# EAGLE board ADXL377 Breakout-Panel-v10 (EAGLE 6.5.0), part 1 of 2
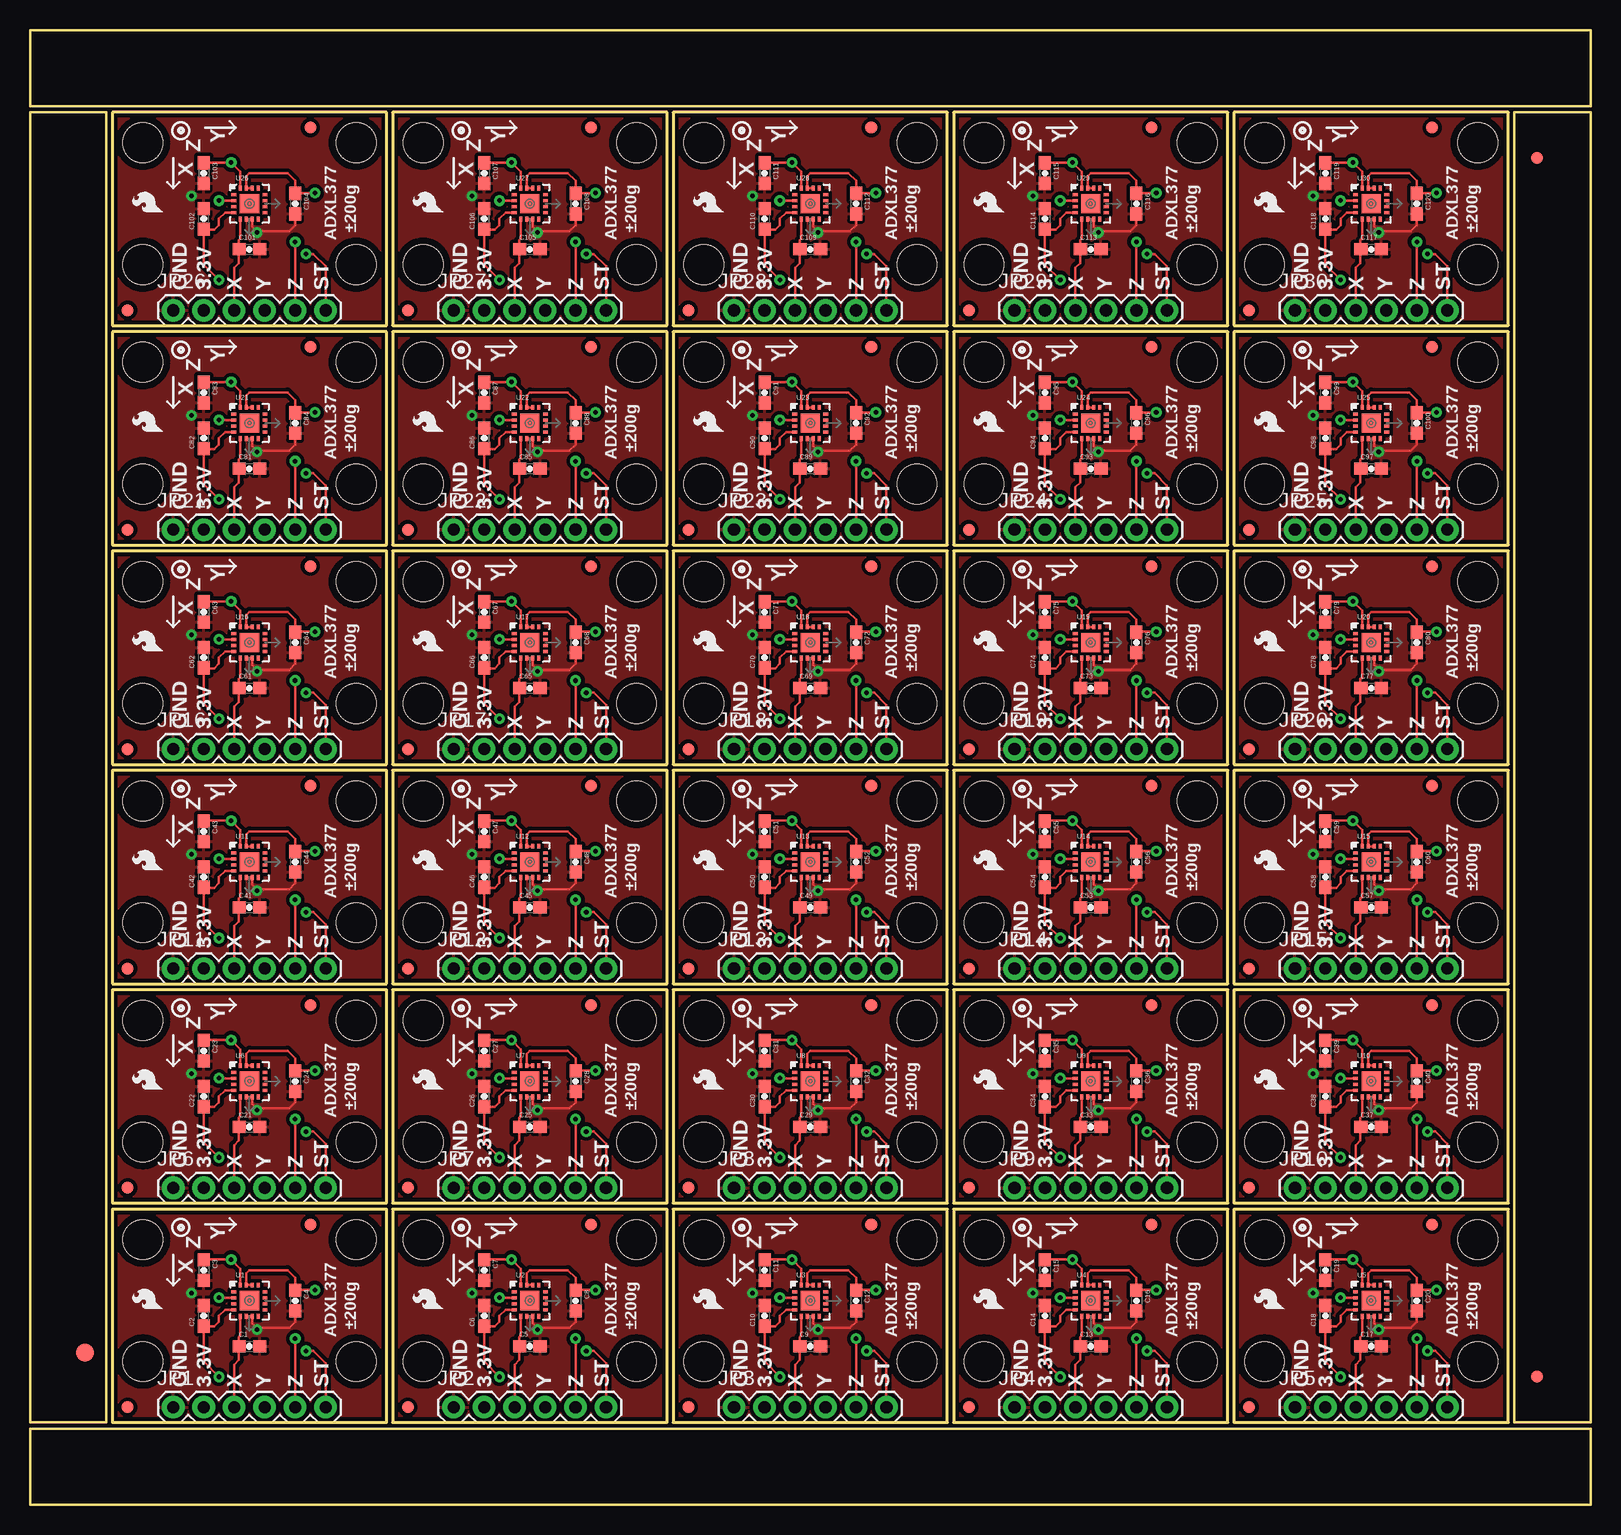
[diagram p0: board, top side]
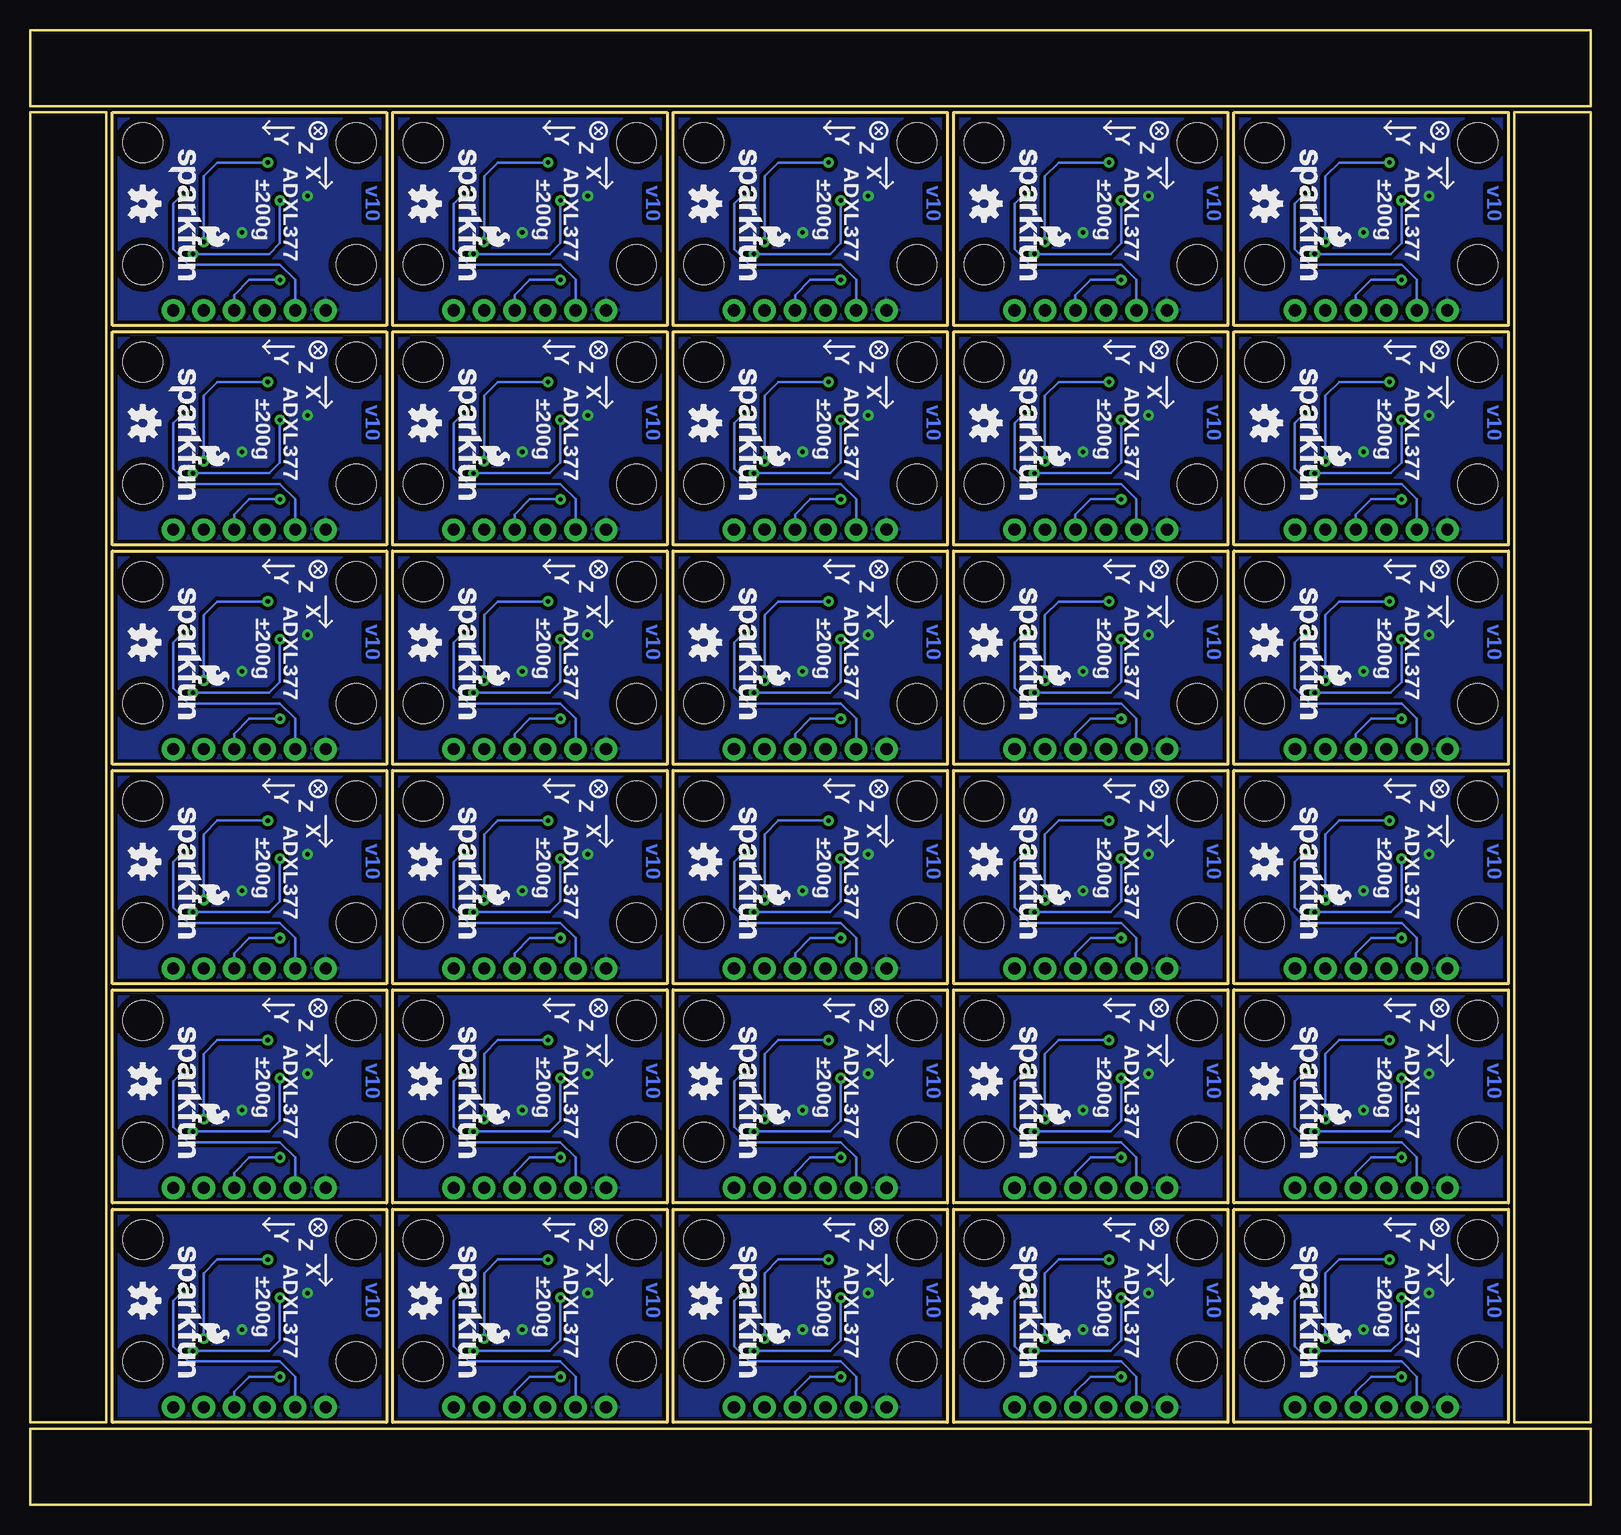
[diagram p1: board, bottom side, seen from below]

Size 130.05 x 122.94 mm. Coordinates in mm from the lower left corner, seen from the top.
Outline: 6.86,6.86 29.72,6.86 29.72,24.64 6.86,24.64 6.86,6.86
Outline: 30.23,6.86 53.09,6.86 53.09,24.64 30.23,24.64 30.23,6.86
Outline: 53.59,6.86 76.45,6.86 76.45,24.64 53.59,24.64 53.59,6.86
Outline: 76.96,6.86 99.82,6.86 99.82,24.64 76.96,24.64 76.96,6.86
Outline: 100.33,6.86 123.19,6.86 123.19,24.64 100.33,24.64 100.33,6.86
Outline: 6.86,25.15 29.72,25.15 29.72,42.93 6.86,42.93 6.86,25.15
Outline: 30.23,25.15 53.09,25.15 53.09,42.93 30.23,42.93 30.23,25.15
Outline: 53.59,25.15 76.45,25.15 76.45,42.93 53.59,42.93 53.59,25.15
Outline: 76.96,25.15 99.82,25.15 99.82,42.93 76.96,42.93 76.96,25.15
Outline: 100.33,25.15 123.19,25.15 123.19,42.93 100.33,42.93 100.33,25.15
Outline: 6.86,43.43 29.72,43.43 29.72,61.21 6.86,61.21 6.86,43.43
Outline: 30.23,43.43 53.09,43.43 53.09,61.21 30.23,61.21 30.23,43.43
Outline: 53.59,43.43 76.45,43.43 76.45,61.21 53.59,61.21 53.59,43.43
Outline: 76.96,43.43 99.82,43.43 99.82,61.21 76.96,61.21 76.96,43.43
Outline: 100.33,43.43 123.19,43.43 123.19,61.21 100.33,61.21 100.33,43.43
Outline: 6.86,61.72 29.72,61.72 29.72,79.5 6.86,79.5 6.86,61.72
Outline: 30.23,61.72 53.09,61.72 53.09,79.5 30.23,79.5 30.23,61.72
Outline: 53.59,61.72 76.45,61.72 76.45,79.5 53.59,79.5 53.59,61.72
Outline: 76.96,61.72 99.82,61.72 99.82,79.5 76.96,79.5 76.96,61.72
Outline: 100.33,61.72 123.19,61.72 123.19,79.5 100.33,79.5 100.33,61.72
Outline: 6.86,80.01 29.72,80.01 29.72,97.79 6.86,97.79 6.86,80.01
Outline: 30.23,80.01 53.09,80.01 53.09,97.79 30.23,97.79 30.23,80.01
Outline: 53.59,80.01 76.45,80.01 76.45,97.79 53.59,97.79 53.59,80.01
Outline: 76.96,80.01 99.82,80.01 99.82,97.79 76.96,97.79 76.96,80.01
Outline: 100.33,80.01 123.19,80.01 123.19,97.79 100.33,97.79 100.33,80.01
Outline: 6.86,98.3 29.72,98.3 29.72,116.08 6.86,116.08 6.86,98.3
Outline: 30.23,98.3 53.09,98.3 53.09,116.08 30.23,116.08 30.23,98.3
Outline: 53.59,98.3 76.45,98.3 76.45,116.08 53.59,116.08 53.59,98.3
Outline: 76.96,98.3 99.82,98.3 99.82,116.08 76.96,116.08 76.96,98.3
Outline: 100.33,98.3 123.19,98.3 123.19,116.08 100.33,116.08 100.33,98.3
Outline: 6.35,6.86 6.35,116.08 0,116.08 0,6.86 6.35,6.86
Outline: 0,0 130.05,0 130.05,6.35 0,6.35 0,0
Outline: 130.05,6.86 130.05,116.08 123.7,116.08 123.7,6.86 130.05,6.86
Outline: 130.05,122.94 0,122.94 0,116.59 130.05,116.59 130.05,122.94
Copper layers (1*16): Top 0.035mm / dielectric 1.5mm / Bottom 0.035mm
Design rules "SparkFun": minimum track width 8mil, minimum drill 20mil, track to track 8mil, track to pad 8mil, pad to pad 8mil, via to via 8mil, smd to smd 8mil, copper to edge 8mil, drill to drill 8mil, minimum pad ring 12mil, minimum via ring 10mil, stop-mask expansion 4mil, vias tented up to drill 20mil, thermal gap 10mil

## Footprints (pad centres in the part's own frame; a part is rotated, then mirrored left to right if it is on the bottom)
0603-CAP = smd 1.1 x 1: 1 -0.85,0; 2 0.85,0
FIDUCIAL-1.5X3 = smd 1.5 x 1.5: 1 0,0
FIDUCIAL-1X2 = smd 1 x 1: 1 0,0
1X06 = drill 1.016 pad 1.88: 1 0,0; 2 2.54,0; 3 5.08,0; 4 7.62,0; 5 10.16,0; 6 12.7,0
STAND-OFF = hole 3.302: 0,0
LFCSP_LQ-16 = smd 0.4 x 0.25: 1 -1.3,0.75; 2 -1.3,0.25; 3 -1.3,-0.25; 4 -1.3,-0.75; 9 1.3,-0.75; 10 1.3,-0.25; 11 1.3,0.25; 12 1.3,0.75 | smd 0.25 x 0.4: 5 -0.75,-1.3; 6 -0.25,-1.3; 7 0.25,-1.3; 8 0.75,-1.3; 13 0.75,1.3; 14 0.25,1.3; 15 -0.25,1.3; 16 -0.75,1.3 | smd 1.6 x 1.6: EXP 0,0

## Placement (x,y rotation side)
C1  10nF  [0603-CAP]  18.29,13.21 0 top
C2  10nF  [0603-CAP]  14.48,15.75 90 top
C3  10nF  [0603-CAP]  14.48,19.56 270 top
C4  0.1uF  [0603-CAP]  22.1,17.02 270 top
C5  10nF  [0603-CAP]  41.66,13.21 0 top
C6  10nF  [0603-CAP]  37.85,15.75 90 top
C7  10nF  [0603-CAP]  37.85,19.56 270 top
C8  0.1uF  [0603-CAP]  45.47,17.02 270 top
C9  10nF  [0603-CAP]  65.02,13.21 0 top
C10  10nF  [0603-CAP]  61.21,15.75 90 top
C11  10nF  [0603-CAP]  61.21,19.56 270 top
C12  0.1uF  [0603-CAP]  68.83,17.02 270 top
C13  10nF  [0603-CAP]  88.39,13.21 0 top
C14  10nF  [0603-CAP]  84.58,15.75 90 top
C15  10nF  [0603-CAP]  84.58,19.56 270 top
C16  0.1uF  [0603-CAP]  92.2,17.02 270 top
C17  10nF  [0603-CAP]  111.76,13.21 0 top
C18  10nF  [0603-CAP]  107.95,15.75 90 top
C19  10nF  [0603-CAP]  107.95,19.56 270 top
C20  0.1uF  [0603-CAP]  115.57,17.02 270 top
C21  10nF  [0603-CAP]  18.29,31.5 0 top
C22  10nF  [0603-CAP]  14.48,34.04 90 top
C23  10nF  [0603-CAP]  14.48,37.85 270 top
C24  0.1uF  [0603-CAP]  22.1,35.31 270 top
C25  10nF  [0603-CAP]  41.66,31.5 0 top
C26  10nF  [0603-CAP]  37.85,34.04 90 top
C27  10nF  [0603-CAP]  37.85,37.85 270 top
C28  0.1uF  [0603-CAP]  45.47,35.31 270 top
C29  10nF  [0603-CAP]  65.02,31.5 0 top
C30  10nF  [0603-CAP]  61.21,34.04 90 top
C31  10nF  [0603-CAP]  61.21,37.85 270 top
C32  0.1uF  [0603-CAP]  68.83,35.31 270 top
C33  10nF  [0603-CAP]  88.39,31.5 0 top
C34  10nF  [0603-CAP]  84.58,34.04 90 top
C35  10nF  [0603-CAP]  84.58,37.85 270 top
C36  0.1uF  [0603-CAP]  92.2,35.31 270 top
C37  10nF  [0603-CAP]  111.76,31.5 0 top
C38  10nF  [0603-CAP]  107.95,34.04 90 top
C39  10nF  [0603-CAP]  107.95,37.85 270 top
C40  0.1uF  [0603-CAP]  115.57,35.31 270 top
C41  10nF  [0603-CAP]  18.29,49.78 0 top
C42  10nF  [0603-CAP]  14.48,52.32 90 top
C43  10nF  [0603-CAP]  14.48,56.13 270 top
C44  0.1uF  [0603-CAP]  22.1,53.59 270 top
C45  10nF  [0603-CAP]  41.66,49.78 0 top
C46  10nF  [0603-CAP]  37.85,52.32 90 top
C47  10nF  [0603-CAP]  37.85,56.13 270 top
C48  0.1uF  [0603-CAP]  45.47,53.59 270 top
C49  10nF  [0603-CAP]  65.02,49.78 0 top
C50  10nF  [0603-CAP]  61.21,52.32 90 top
C51  10nF  [0603-CAP]  61.21,56.13 270 top
C52  0.1uF  [0603-CAP]  68.83,53.59 270 top
C53  10nF  [0603-CAP]  88.39,49.78 0 top
C54  10nF  [0603-CAP]  84.58,52.32 90 top
C55  10nF  [0603-CAP]  84.58,56.13 270 top
C56  0.1uF  [0603-CAP]  92.2,53.59 270 top
C57  10nF  [0603-CAP]  111.76,49.78 0 top
C58  10nF  [0603-CAP]  107.95,52.32 90 top
C59  10nF  [0603-CAP]  107.95,56.13 270 top
C60  0.1uF  [0603-CAP]  115.57,53.59 270 top
C61  10nF  [0603-CAP]  18.29,68.07 0 top
C62  10nF  [0603-CAP]  14.48,70.61 90 top
C63  10nF  [0603-CAP]  14.48,74.42 270 top
C64  0.1uF  [0603-CAP]  22.1,71.88 270 top
C65  10nF  [0603-CAP]  41.66,68.07 0 top
C66  10nF  [0603-CAP]  37.85,70.61 90 top
C67  10nF  [0603-CAP]  37.85,74.42 270 top
C68  0.1uF  [0603-CAP]  45.47,71.88 270 top
C69  10nF  [0603-CAP]  65.02,68.07 0 top
C70  10nF  [0603-CAP]  61.21,70.61 90 top
C71  10nF  [0603-CAP]  61.21,74.42 270 top
C72  0.1uF  [0603-CAP]  68.83,71.88 270 top
C73  10nF  [0603-CAP]  88.39,68.07 0 top
C74  10nF  [0603-CAP]  84.58,70.61 90 top
C75  10nF  [0603-CAP]  84.58,74.42 270 top
C76  0.1uF  [0603-CAP]  92.2,71.88 270 top
C77  10nF  [0603-CAP]  111.76,68.07 0 top
C78  10nF  [0603-CAP]  107.95,70.61 90 top
C79  10nF  [0603-CAP]  107.95,74.42 270 top
C80  0.1uF  [0603-CAP]  115.57,71.88 270 top
C81  10nF  [0603-CAP]  18.29,86.36 0 top
C82  10nF  [0603-CAP]  14.48,88.9 90 top
C83  10nF  [0603-CAP]  14.48,92.71 270 top
C84  0.1uF  [0603-CAP]  22.1,90.17 270 top
C85  10nF  [0603-CAP]  41.66,86.36 0 top
C86  10nF  [0603-CAP]  37.85,88.9 90 top
C87  10nF  [0603-CAP]  37.85,92.71 270 top
C88  0.1uF  [0603-CAP]  45.47,90.17 270 top
C89  10nF  [0603-CAP]  65.02,86.36 0 top
C90  10nF  [0603-CAP]  61.21,88.9 90 top
C91  10nF  [0603-CAP]  61.21,92.71 270 top
C92  0.1uF  [0603-CAP]  68.83,90.17 270 top
C93  10nF  [0603-CAP]  88.39,86.36 0 top
C94  10nF  [0603-CAP]  84.58,88.9 90 top
C95  10nF  [0603-CAP]  84.58,92.71 270 top
C96  0.1uF  [0603-CAP]  92.2,90.17 270 top
C97  10nF  [0603-CAP]  111.76,86.36 0 top
C98  10nF  [0603-CAP]  107.95,88.9 90 top
C99  10nF  [0603-CAP]  107.95,92.71 270 top
C100  0.1uF  [0603-CAP]  115.57,90.17 270 top
C101  10nF  [0603-CAP]  18.29,104.65 0 top
C102  10nF  [0603-CAP]  14.48,107.19 90 top
C103  10nF  [0603-CAP]  14.48,111 270 top
C104  0.1uF  [0603-CAP]  22.1,108.46 270 top
C105  10nF  [0603-CAP]  41.66,104.65 0 top
C106  10nF  [0603-CAP]  37.85,107.19 90 top
C107  10nF  [0603-CAP]  37.85,111 270 top
C108  0.1uF  [0603-CAP]  45.47,108.46 270 top
C109  10nF  [0603-CAP]  65.02,104.65 0 top
C110  10nF  [0603-CAP]  61.21,107.19 90 top
C111  10nF  [0603-CAP]  61.21,111 270 top
C112  0.1uF  [0603-CAP]  68.83,108.46 270 top
C113  10nF  [0603-CAP]  88.39,104.65 0 top
C114  10nF  [0603-CAP]  84.58,107.19 90 top
C115  10nF  [0603-CAP]  84.58,111 270 top
C116  0.1uF  [0603-CAP]  92.2,108.46 270 top
C117  10nF  [0603-CAP]  111.76,104.65 0 top
C118  10nF  [0603-CAP]  107.95,107.19 90 top
C119  10nF  [0603-CAP]  107.95,111 270 top
C120  0.1uF  [0603-CAP]  115.57,108.46 270 top
E$1  [FIDUCIAL-1.5X3]  4.57,12.7 0 top
E$4  [FIDUCIAL-1X2]  125.6,10.67 0 top
E$6  [FIDUCIAL-1X2]  125.6,112.27 180 top
FID1  FIDUCIAL1X2  [FIDUCIAL-1X2]  23.37,23.37 0 top
FID2  FIDUCIAL1X2  [FIDUCIAL-1X2]  8.13,8.13 0 top
FID3  FIDUCIAL1X2  [FIDUCIAL-1X2]  46.74,23.37 0 top
FID4  FIDUCIAL1X2  [FIDUCIAL-1X2]  31.5,8.13 0 top
FID5  FIDUCIAL1X2  [FIDUCIAL-1X2]  70.1,23.37 0 top
FID6  FIDUCIAL1X2  [FIDUCIAL-1X2]  54.86,8.13 0 top
FID7  FIDUCIAL1X2  [FIDUCIAL-1X2]  93.47,23.37 0 top
FID8  FIDUCIAL1X2  [FIDUCIAL-1X2]  78.23,8.13 0 top
FID9  FIDUCIAL1X2  [FIDUCIAL-1X2]  116.84,23.37 0 top
FID10  FIDUCIAL1X2  [FIDUCIAL-1X2]  101.6,8.13 0 top
FID11  FIDUCIAL1X2  [FIDUCIAL-1X2]  23.37,41.66 0 top
FID12  FIDUCIAL1X2  [FIDUCIAL-1X2]  8.13,26.42 0 top
FID13  FIDUCIAL1X2  [FIDUCIAL-1X2]  46.74,41.66 0 top
FID14  FIDUCIAL1X2  [FIDUCIAL-1X2]  31.5,26.42 0 top
FID15  FIDUCIAL1X2  [FIDUCIAL-1X2]  70.1,41.66 0 top
FID16  FIDUCIAL1X2  [FIDUCIAL-1X2]  54.86,26.42 0 top
FID17  FIDUCIAL1X2  [FIDUCIAL-1X2]  93.47,41.66 0 top
FID18  FIDUCIAL1X2  [FIDUCIAL-1X2]  78.23,26.42 0 top
FID19  FIDUCIAL1X2  [FIDUCIAL-1X2]  116.84,41.66 0 top
FID20  FIDUCIAL1X2  [FIDUCIAL-1X2]  101.6,26.42 0 top
FID21  FIDUCIAL1X2  [FIDUCIAL-1X2]  23.37,59.94 0 top
FID22  FIDUCIAL1X2  [FIDUCIAL-1X2]  8.13,44.7 0 top
FID23  FIDUCIAL1X2  [FIDUCIAL-1X2]  46.74,59.94 0 top
FID24  FIDUCIAL1X2  [FIDUCIAL-1X2]  31.5,44.7 0 top
FID25  FIDUCIAL1X2  [FIDUCIAL-1X2]  70.1,59.94 0 top
FID26  FIDUCIAL1X2  [FIDUCIAL-1X2]  54.86,44.7 0 top
FID27  FIDUCIAL1X2  [FIDUCIAL-1X2]  93.47,59.94 0 top
FID28  FIDUCIAL1X2  [FIDUCIAL-1X2]  78.23,44.7 0 top
FID29  FIDUCIAL1X2  [FIDUCIAL-1X2]  116.84,59.94 0 top
FID30  FIDUCIAL1X2  [FIDUCIAL-1X2]  101.6,44.7 0 top
FID31  FIDUCIAL1X2  [FIDUCIAL-1X2]  23.37,78.23 0 top
FID32  FIDUCIAL1X2  [FIDUCIAL-1X2]  8.13,62.99 0 top
FID33  FIDUCIAL1X2  [FIDUCIAL-1X2]  46.74,78.23 0 top
FID34  FIDUCIAL1X2  [FIDUCIAL-1X2]  31.5,62.99 0 top
FID35  FIDUCIAL1X2  [FIDUCIAL-1X2]  70.1,78.23 0 top
FID36  FIDUCIAL1X2  [FIDUCIAL-1X2]  54.86,62.99 0 top
FID37  FIDUCIAL1X2  [FIDUCIAL-1X2]  93.47,78.23 0 top
FID38  FIDUCIAL1X2  [FIDUCIAL-1X2]  78.23,62.99 0 top
FID39  FIDUCIAL1X2  [FIDUCIAL-1X2]  116.84,78.23 0 top
FID40  FIDUCIAL1X2  [FIDUCIAL-1X2]  101.6,62.99 0 top
FID41  FIDUCIAL1X2  [FIDUCIAL-1X2]  23.37,96.52 0 top
FID42  FIDUCIAL1X2  [FIDUCIAL-1X2]  8.13,81.28 0 top
FID43  FIDUCIAL1X2  [FIDUCIAL-1X2]  46.74,96.52 0 top
FID44  FIDUCIAL1X2  [FIDUCIAL-1X2]  31.5,81.28 0 top
FID45  FIDUCIAL1X2  [FIDUCIAL-1X2]  70.1,96.52 0 top
FID46  FIDUCIAL1X2  [FIDUCIAL-1X2]  54.86,81.28 0 top
FID47  FIDUCIAL1X2  [FIDUCIAL-1X2]  93.47,96.52 0 top
FID48  FIDUCIAL1X2  [FIDUCIAL-1X2]  78.23,81.28 0 top
FID49  FIDUCIAL1X2  [FIDUCIAL-1X2]  116.84,96.52 0 top
FID50  FIDUCIAL1X2  [FIDUCIAL-1X2]  101.6,81.28 0 top
FID51  FIDUCIAL1X2  [FIDUCIAL-1X2]  23.37,114.81 0 top
FID52  FIDUCIAL1X2  [FIDUCIAL-1X2]  8.13,99.57 0 top
FID53  FIDUCIAL1X2  [FIDUCIAL-1X2]  46.74,114.81 0 top
FID54  FIDUCIAL1X2  [FIDUCIAL-1X2]  31.5,99.57 0 top
FID55  FIDUCIAL1X2  [FIDUCIAL-1X2]  70.1,114.81 0 top
FID56  FIDUCIAL1X2  [FIDUCIAL-1X2]  54.86,99.57 0 top
FID57  FIDUCIAL1X2  [FIDUCIAL-1X2]  93.47,114.81 0 top
FID58  FIDUCIAL1X2  [FIDUCIAL-1X2]  78.23,99.57 0 top
FID59  FIDUCIAL1X2  [FIDUCIAL-1X2]  116.84,114.81 0 top
FID60  FIDUCIAL1X2  [FIDUCIAL-1X2]  101.6,99.57 0 top
JP1  [1X06]  11.94,8.13 0 top
JP2  [1X06]  35.31,8.13 0 top
JP3  [1X06]  58.67,8.13 0 top
JP4  [1X06]  82.04,8.13 0 top
JP5  [1X06]  105.41,8.13 0 top
JP6  [1X06]  11.94,26.42 0 top
JP7  [1X06]  35.31,26.42 0 top
JP8  [1X06]  58.67,26.42 0 top
JP9  [1X06]  82.04,26.42 0 top
JP10  [1X06]  105.41,26.42 0 top
JP11  [1X06]  11.94,44.7 0 top
JP12  [1X06]  35.31,44.7 0 top
JP13  [1X06]  58.67,44.7 0 top
JP14  [1X06]  82.04,44.7 0 top
JP15  [1X06]  105.41,44.7 0 top
JP16  [1X06]  11.94,62.99 0 top
JP17  [1X06]  35.31,62.99 0 top
JP18  [1X06]  58.67,62.99 0 top
JP19  [1X06]  82.04,62.99 0 top
JP20  [1X06]  105.41,62.99 0 top
JP21  [1X06]  11.94,81.28 0 top
JP22  [1X06]  35.31,81.28 0 top
JP23  [1X06]  58.67,81.28 0 top
JP24  [1X06]  82.04,81.28 0 top
JP25  [1X06]  105.41,81.28 0 top
JP26  [1X06]  11.94,99.57 0 top
JP27  [1X06]  35.31,99.57 0 top
JP28  [1X06]  58.67,99.57 0 top
JP29  [1X06]  82.04,99.57 0 top
JP30  [1X06]  105.41,99.57 0 top
LOGO1  SFE_LOGO_FLAME.1_INCH  [SFE_LOGO_FLAME_.1]  11.43,16 90 top
LOGO2  OSHW-LOGOS  [OSHW-LOGO-S]  27.18,17.02 270 bottom
LOGO3  SFE_LOGO_NAME_FLAME.1_INCH  [SFE_LOGO_NAME_FLAME_.1]  25.15,21.97 270 bottom
LOGO4  SFE_LOGO_FLAME.1_INCH  [SFE_LOGO_FLAME_.1]  34.8,16 90 top
LOGO5  OSHW-LOGOS  [OSHW-LOGO-S]  50.55,17.02 270 bottom
LOGO6  SFE_LOGO_NAME_FLAME.1_INCH  [SFE_LOGO_NAME_FLAME_.1]  48.51,21.97 270 bottom
LOGO7  SFE_LOGO_FLAME.1_INCH  [SFE_LOGO_FLAME_.1]  58.17,16 90 top
LOGO8  OSHW-LOGOS  [OSHW-LOGO-S]  73.91,17.02 270 bottom
LOGO9  SFE_LOGO_NAME_FLAME.1_INCH  [SFE_LOGO_NAME_FLAME_.1]  71.88,21.97 270 bottom
LOGO10  SFE_LOGO_FLAME.1_INCH  [SFE_LOGO_FLAME_.1]  81.53,16 90 top
LOGO11  OSHW-LOGOS  [OSHW-LOGO-S]  97.28,17.02 270 bottom
LOGO12  SFE_LOGO_NAME_FLAME.1_INCH  [SFE_LOGO_NAME_FLAME_.1]  95.25,21.97 270 bottom
LOGO13  SFE_LOGO_FLAME.1_INCH  [SFE_LOGO_FLAME_.1]  104.9,16 90 top
LOGO14  OSHW-LOGOS  [OSHW-LOGO-S]  120.65,17.02 270 bottom
LOGO15  SFE_LOGO_NAME_FLAME.1_INCH  [SFE_LOGO_NAME_FLAME_.1]  118.62,21.97 270 bottom
LOGO16  SFE_LOGO_FLAME.1_INCH  [SFE_LOGO_FLAME_.1]  11.43,34.29 90 top
LOGO17  OSHW-LOGOS  [OSHW-LOGO-S]  27.18,35.31 270 bottom
LOGO18  SFE_LOGO_NAME_FLAME.1_INCH  [SFE_LOGO_NAME_FLAME_.1]  25.15,40.26 270 bottom
LOGO19  SFE_LOGO_FLAME.1_INCH  [SFE_LOGO_FLAME_.1]  34.8,34.29 90 top
LOGO20  OSHW-LOGOS  [OSHW-LOGO-S]  50.55,35.31 270 bottom
LOGO21  SFE_LOGO_NAME_FLAME.1_INCH  [SFE_LOGO_NAME_FLAME_.1]  48.51,40.26 270 bottom
LOGO22  SFE_LOGO_FLAME.1_INCH  [SFE_LOGO_FLAME_.1]  58.17,34.29 90 top
LOGO23  OSHW-LOGOS  [OSHW-LOGO-S]  73.91,35.31 270 bottom
LOGO24  SFE_LOGO_NAME_FLAME.1_INCH  [SFE_LOGO_NAME_FLAME_.1]  71.88,40.26 270 bottom
LOGO25  SFE_LOGO_FLAME.1_INCH  [SFE_LOGO_FLAME_.1]  81.53,34.29 90 top
LOGO26  OSHW-LOGOS  [OSHW-LOGO-S]  97.28,35.31 270 bottom
LOGO27  SFE_LOGO_NAME_FLAME.1_INCH  [SFE_LOGO_NAME_FLAME_.1]  95.25,40.26 270 bottom
LOGO28  SFE_LOGO_FLAME.1_INCH  [SFE_LOGO_FLAME_.1]  104.9,34.29 90 top
LOGO29  OSHW-LOGOS  [OSHW-LOGO-S]  120.65,35.31 270 bottom
LOGO30  SFE_LOGO_NAME_FLAME.1_INCH  [SFE_LOGO_NAME_FLAME_.1]  118.62,40.26 270 bottom
LOGO31  SFE_LOGO_FLAME.1_INCH  [SFE_LOGO_FLAME_.1]  11.43,52.58 90 top
LOGO32  OSHW-LOGOS  [OSHW-LOGO-S]  27.18,53.59 270 bottom
LOGO33  SFE_LOGO_NAME_FLAME.1_INCH  [SFE_LOGO_NAME_FLAME_.1]  25.15,58.55 270 bottom
LOGO34  SFE_LOGO_FLAME.1_INCH  [SFE_LOGO_FLAME_.1]  34.8,52.58 90 top
LOGO35  OSHW-LOGOS  [OSHW-LOGO-S]  50.55,53.59 270 bottom
LOGO36  SFE_LOGO_NAME_FLAME.1_INCH  [SFE_LOGO_NAME_FLAME_.1]  48.51,58.55 270 bottom
LOGO37  SFE_LOGO_FLAME.1_INCH  [SFE_LOGO_FLAME_.1]  58.17,52.58 90 top
LOGO38  OSHW-LOGOS  [OSHW-LOGO-S]  73.91,53.59 270 bottom
LOGO39  SFE_LOGO_NAME_FLAME.1_INCH  [SFE_LOGO_NAME_FLAME_.1]  71.88,58.55 270 bottom
LOGO40  SFE_LOGO_FLAME.1_INCH  [SFE_LOGO_FLAME_.1]  81.53,52.58 90 top
LOGO41  OSHW-LOGOS  [OSHW-LOGO-S]  97.28,53.59 270 bottom
LOGO42  SFE_LOGO_NAME_FLAME.1_INCH  [SFE_LOGO_NAME_FLAME_.1]  95.25,58.55 270 bottom
LOGO43  SFE_LOGO_FLAME.1_INCH  [SFE_LOGO_FLAME_.1]  104.9,52.58 90 top
LOGO44  OSHW-LOGOS  [OSHW-LOGO-S]  120.65,53.59 270 bottom
LOGO45  SFE_LOGO_NAME_FLAME.1_INCH  [SFE_LOGO_NAME_FLAME_.1]  118.62,58.55 270 bottom
LOGO46  SFE_LOGO_FLAME.1_INCH  [SFE_LOGO_FLAME_.1]  11.43,70.87 90 top
LOGO47  OSHW-LOGOS  [OSHW-LOGO-S]  27.18,71.88 270 bottom
LOGO48  SFE_LOGO_NAME_FLAME.1_INCH  [SFE_LOGO_NAME_FLAME_.1]  25.15,76.83 270 bottom
LOGO49  SFE_LOGO_FLAME.1_INCH  [SFE_LOGO_FLAME_.1]  34.8,70.87 90 top
LOGO50  OSHW-LOGOS  [OSHW-LOGO-S]  50.55,71.88 270 bottom
LOGO51  SFE_LOGO_NAME_FLAME.1_INCH  [SFE_LOGO_NAME_FLAME_.1]  48.51,76.83 270 bottom
LOGO52  SFE_LOGO_FLAME.1_INCH  [SFE_LOGO_FLAME_.1]  58.17,70.87 90 top
LOGO53  OSHW-LOGOS  [OSHW-LOGO-S]  73.91,71.88 270 bottom
LOGO54  SFE_LOGO_NAME_FLAME.1_INCH  [SFE_LOGO_NAME_FLAME_.1]  71.88,76.83 270 bottom
LOGO55  SFE_LOGO_FLAME.1_INCH  [SFE_LOGO_FLAME_.1]  81.53,70.87 90 top
LOGO56  OSHW-LOGOS  [OSHW-LOGO-S]  97.28,71.88 270 bottom
LOGO57  SFE_LOGO_NAME_FLAME.1_INCH  [SFE_LOGO_NAME_FLAME_.1]  95.25,76.83 270 bottom
LOGO58  SFE_LOGO_FLAME.1_INCH  [SFE_LOGO_FLAME_.1]  104.9,70.87 90 top
LOGO59  OSHW-LOGOS  [OSHW-LOGO-S]  120.65,71.88 270 bottom
LOGO60  SFE_LOGO_NAME_FLAME.1_INCH  [SFE_LOGO_NAME_FLAME_.1]  118.62,76.83 270 bottom
LOGO61  SFE_LOGO_FLAME.1_INCH  [SFE_LOGO_FLAME_.1]  11.43,89.15 90 top
LOGO62  OSHW-LOGOS  [OSHW-LOGO-S]  27.18,90.17 270 bottom
LOGO63  SFE_LOGO_NAME_FLAME.1_INCH  [SFE_LOGO_NAME_FLAME_.1]  25.15,95.12 270 bottom
LOGO64  SFE_LOGO_FLAME.1_INCH  [SFE_LOGO_FLAME_.1]  34.8,89.15 90 top
LOGO65  OSHW-LOGOS  [OSHW-LOGO-S]  50.55,90.17 270 bottom
LOGO66  SFE_LOGO_NAME_FLAME.1_INCH  [SFE_LOGO_NAME_FLAME_.1]  48.51,95.12 270 bottom
LOGO67  SFE_LOGO_FLAME.1_INCH  [SFE_LOGO_FLAME_.1]  58.17,89.15 90 top
LOGO68  OSHW-LOGOS  [OSHW-LOGO-S]  73.91,90.17 270 bottom
LOGO69  SFE_LOGO_NAME_FLAME.1_INCH  [SFE_LOGO_NAME_FLAME_.1]  71.88,95.12 270 bottom
LOGO70  SFE_LOGO_FLAME.1_INCH  [SFE_LOGO_FLAME_.1]  81.53,89.15 90 top
LOGO71  OSHW-LOGOS  [OSHW-LOGO-S]  97.28,90.17 270 bottom
LOGO72  SFE_LOGO_NAME_FLAME.1_INCH  [SFE_LOGO_NAME_FLAME_.1]  95.25,95.12 270 bottom
LOGO73  SFE_LOGO_FLAME.1_INCH  [SFE_LOGO_FLAME_.1]  104.9,89.15 90 top
LOGO74  OSHW-LOGOS  [OSHW-LOGO-S]  120.65,90.17 270 bottom
LOGO75  SFE_LOGO_NAME_FLAME.1_INCH  [SFE_LOGO_NAME_FLAME_.1]  118.62,95.12 270 bottom
LOGO76  SFE_LOGO_FLAME.1_INCH  [SFE_LOGO_FLAME_.1]  11.43,107.44 90 top
LOGO77  OSHW-LOGOS  [OSHW-LOGO-S]  27.18,108.46 270 bottom
LOGO78  SFE_LOGO_NAME_FLAME.1_INCH  [SFE_LOGO_NAME_FLAME_.1]  25.15,113.41 270 bottom
LOGO79  SFE_LOGO_FLAME.1_INCH  [SFE_LOGO_FLAME_.1]  34.8,107.44 90 top
LOGO80  OSHW-LOGOS  [OSHW-LOGO-S]  50.55,108.46 270 bottom
LOGO81  SFE_LOGO_NAME_FLAME.1_INCH  [SFE_LOGO_NAME_FLAME_.1]  48.51,113.41 270 bottom
LOGO82  SFE_LOGO_FLAME.1_INCH  [SFE_LOGO_FLAME_.1]  58.17,107.44 90 top
LOGO83  OSHW-LOGOS  [OSHW-LOGO-S]  73.91,108.46 270 bottom
LOGO84  SFE_LOGO_NAME_FLAME.1_INCH  [SFE_LOGO_NAME_FLAME_.1]  71.88,113.41 270 bottom
LOGO85  SFE_LOGO_FLAME.1_INCH  [SFE_LOGO_FLAME_.1]  81.53,107.44 90 top
LOGO86  OSHW-LOGOS  [OSHW-LOGO-S]  97.28,108.46 270 bottom
LOGO87  SFE_LOGO_NAME_FLAME.1_INCH  [SFE_LOGO_NAME_FLAME_.1]  95.25,113.41 270 bottom
LOGO88  SFE_LOGO_FLAME.1_INCH  [SFE_LOGO_FLAME_.1]  104.9,107.44 90 top
LOGO89  OSHW-LOGOS  [OSHW-LOGO-S]  120.65,108.46 270 bottom
LOGO90  SFE_LOGO_NAME_FLAME.1_INCH  [SFE_LOGO_NAME_FLAME_.1]  118.62,113.41 270 bottom
STANDOFF1  STAND-OFF  [STAND-OFF]  27.18,22.1 0 top
STANDOFF2  STAND-OFF  [STAND-OFF]  9.4,11.94 0 top
STANDOFF3  STAND-OFF  [STAND-OFF]  9.4,22.1 0 top
STANDOFF4  STAND-OFF  [STAND-OFF]  27.18,11.94 0 top
STANDOFF5  STAND-OFF  [STAND-OFF]  50.55,22.1 0 top
STANDOFF6  STAND-OFF  [STAND-OFF]  32.77,11.94 0 top
STANDOFF7  STAND-OFF  [STAND-OFF]  32.77,22.1 0 top
STANDOFF8  STAND-OFF  [STAND-OFF]  50.55,11.94 0 top
STANDOFF9  STAND-OFF  [STAND-OFF]  73.91,22.1 0 top
STANDOFF10  STAND-OFF  [STAND-OFF]  56.13,11.94 0 top
STANDOFF11  STAND-OFF  [STAND-OFF]  56.13,22.1 0 top
STANDOFF12  STAND-OFF  [STAND-OFF]  73.91,11.94 0 top
STANDOFF13  STAND-OFF  [STAND-OFF]  97.28,22.1 0 top
STANDOFF14  STAND-OFF  [STAND-OFF]  79.5,11.94 0 top
STANDOFF15  STAND-OFF  [STAND-OFF]  79.5,22.1 0 top
STANDOFF16  STAND-OFF  [STAND-OFF]  97.28,11.94 0 top
STANDOFF17  STAND-OFF  [STAND-OFF]  120.65,22.1 0 top
STANDOFF18  STAND-OFF  [STAND-OFF]  102.87,11.94 0 top
STANDOFF19  STAND-OFF  [STAND-OFF]  102.87,22.1 0 top
STANDOFF20  STAND-OFF  [STAND-OFF]  120.65,11.94 0 top
STANDOFF21  STAND-OFF  [STAND-OFF]  27.18,40.39 0 top
STANDOFF22  STAND-OFF  [STAND-OFF]  9.4,30.23 0 top
STANDOFF23  STAND-OFF  [STAND-OFF]  9.4,40.39 0 top
STANDOFF24  STAND-OFF  [STAND-OFF]  27.18,30.23 0 top
STANDOFF25  STAND-OFF  [STAND-OFF]  50.55,40.39 0 top
STANDOFF26  STAND-OFF  [STAND-OFF]  32.77,30.23 0 top
STANDOFF27  STAND-OFF  [STAND-OFF]  32.77,40.39 0 top
STANDOFF28  STAND-OFF  [STAND-OFF]  50.55,30.23 0 top
STANDOFF29  STAND-OFF  [STAND-OFF]  73.91,40.39 0 top
STANDOFF30  STAND-OFF  [STAND-OFF]  56.13,30.23 0 top
STANDOFF31  STAND-OFF  [STAND-OFF]  56.13,40.39 0 top
STANDOFF32  STAND-OFF  [STAND-OFF]  73.91,30.23 0 top
STANDOFF33  STAND-OFF  [STAND-OFF]  97.28,40.39 0 top
STANDOFF34  STAND-OFF  [STAND-OFF]  79.5,30.23 0 top
STANDOFF35  STAND-OFF  [STAND-OFF]  79.5,40.39 0 top
STANDOFF36  STAND-OFF  [STAND-OFF]  97.28,30.23 0 top
STANDOFF37  STAND-OFF  [STAND-OFF]  120.65,40.39 0 top
STANDOFF38  STAND-OFF  [STAND-OFF]  102.87,30.23 0 top
STANDOFF39  STAND-OFF  [STAND-OFF]  102.87,40.39 0 top
STANDOFF40  STAND-OFF  [STAND-OFF]  120.65,30.23 0 top
STANDOFF41  STAND-OFF  [STAND-OFF]  27.18,58.67 0 top
STANDOFF42  STAND-OFF  [STAND-OFF]  9.4,48.51 0 top
STANDOFF43  STAND-OFF  [STAND-OFF]  9.4,58.67 0 top
STANDOFF44  STAND-OFF  [STAND-OFF]  27.18,48.51 0 top
STANDOFF45  STAND-OFF  [STAND-OFF]  50.55,58.67 0 top
STANDOFF46  STAND-OFF  [STAND-OFF]  32.77,48.51 0 top
STANDOFF47  STAND-OFF  [STAND-OFF]  32.77,58.67 0 top
STANDOFF48  STAND-OFF  [STAND-OFF]  50.55,48.51 0 top
STANDOFF49  STAND-OFF  [STAND-OFF]  73.91,58.67 0 top
STANDOFF50  STAND-OFF  [STAND-OFF]  56.13,48.51 0 top
STANDOFF51  STAND-OFF  [STAND-OFF]  56.13,58.67 0 top
STANDOFF52  STAND-OFF  [STAND-OFF]  73.91,48.51 0 top
STANDOFF53  STAND-OFF  [STAND-OFF]  97.28,58.67 0 top
STANDOFF54  STAND-OFF  [STAND-OFF]  79.5,48.51 0 top
STANDOFF55  STAND-OFF  [STAND-OFF]  79.5,58.67 0 top
STANDOFF56  STAND-OFF  [STAND-OFF]  97.28,48.51 0 top
STANDOFF57  STAND-OFF  [STAND-OFF]  120.65,58.67 0 top
STANDOFF58  STAND-OFF  [STAND-OFF]  102.87,48.51 0 top
STANDOFF59  STAND-OFF  [STAND-OFF]  102.87,58.67 0 top
STANDOFF60  STAND-OFF  [STAND-OFF]  120.65,48.51 0 top
STANDOFF61  STAND-OFF  [STAND-OFF]  27.18,76.96 0 top
STANDOFF62  STAND-OFF  [STAND-OFF]  9.4,66.8 0 top
STANDOFF63  STAND-OFF  [STAND-OFF]  9.4,76.96 0 top
STANDOFF64  STAND-OFF  [STAND-OFF]  27.18,66.8 0 top
STANDOFF65  STAND-OFF  [STAND-OFF]  50.55,76.96 0 top
STANDOFF66  STAND-OFF  [STAND-OFF]  32.77,66.8 0 top
STANDOFF67  STAND-OFF  [STAND-OFF]  32.77,76.96 0 top
STANDOFF68  STAND-OFF  [STAND-OFF]  50.55,66.8 0 top
STANDOFF69  STAND-OFF  [STAND-OFF]  73.91,76.96 0 top
STANDOFF70  STAND-OFF  [STAND-OFF]  56.13,66.8 0 top
STANDOFF71  STAND-OFF  [STAND-OFF]  56.13,76.96 0 top
STANDOFF72  STAND-OFF  [STAND-OFF]  73.91,66.8 0 top
STANDOFF73  STAND-OFF  [STAND-OFF]  97.28,76.96 0 top
STANDOFF74  STAND-OFF  [STAND-OFF]  79.5,66.8 0 top
STANDOFF75  STAND-OFF  [STAND-OFF]  79.5,76.96 0 top
STANDOFF76  STAND-OFF  [STAND-OFF]  97.28,66.8 0 top
STANDOFF77  STAND-OFF  [STAND-OFF]  120.65,76.96 0 top
STANDOFF78  STAND-OFF  [STAND-OFF]  102.87,66.8 0 top
STANDOFF79  STAND-OFF  [STAND-OFF]  102.87,76.96 0 top
STANDOFF80  STAND-OFF  [STAND-OFF]  120.65,66.8 0 top
STANDOFF81  STAND-OFF  [STAND-OFF]  27.18,95.25 0 top
STANDOFF82  STAND-OFF  [STAND-OFF]  9.4,85.09 0 top
STANDOFF83  STAND-OFF  [STAND-OFF]  9.4,95.25 0 top
STANDOFF84  STAND-OFF  [STAND-OFF]  27.18,85.09 0 top
STANDOFF85  STAND-OFF  [STAND-OFF]  50.55,95.25 0 top
STANDOFF86  STAND-OFF  [STAND-OFF]  32.77,85.09 0 top
STANDOFF87  STAND-OFF  [STAND-OFF]  32.77,95.25 0 top
STANDOFF88  STAND-OFF  [STAND-OFF]  50.55,85.09 0 top
STANDOFF89  STAND-OFF  [STAND-OFF]  73.91,95.25 0 top
STANDOFF90  STAND-OFF  [STAND-OFF]  56.13,85.09 0 top
STANDOFF91  STAND-OFF  [STAND-OFF]  56.13,95.25 0 top
STANDOFF92  STAND-OFF  [STAND-OFF]  73.91,85.09 0 top
STANDOFF93  STAND-OFF  [STAND-OFF]  97.28,95.25 0 top
STANDOFF94  STAND-OFF  [STAND-OFF]  79.5,85.09 0 top
STANDOFF95  STAND-OFF  [STAND-OFF]  79.5,95.25 0 top
STANDOFF96  STAND-OFF  [STAND-OFF]  97.28,85.09 0 top
STANDOFF97  STAND-OFF  [STAND-OFF]  120.65,95.25 0 top
STANDOFF98  STAND-OFF  [STAND-OFF]  102.87,85.09 0 top
STANDOFF99  STAND-OFF  [STAND-OFF]  102.87,95.25 0 top
STANDOFF100  STAND-OFF  [STAND-OFF]  120.65,85.09 0 top
STANDOFF101  STAND-OFF  [STAND-OFF]  27.18,113.54 0 top
STANDOFF102  STAND-OFF  [STAND-OFF]  9.4,103.38 0 top
STANDOFF103  STAND-OFF  [STAND-OFF]  9.4,113.54 0 top
STANDOFF104  STAND-OFF  [STAND-OFF]  27.18,103.38 0 top
STANDOFF105  STAND-OFF  [STAND-OFF]  50.55,113.54 0 top
STANDOFF106  STAND-OFF  [STAND-OFF]  32.77,103.38 0 top
STANDOFF107  STAND-OFF  [STAND-OFF]  32.77,113.54 0 top
STANDOFF108  STAND-OFF  [STAND-OFF]  50.55,103.38 0 top
STANDOFF109  STAND-OFF  [STAND-OFF]  73.91,113.54 0 top
STANDOFF110  STAND-OFF  [STAND-OFF]  56.13,103.38 0 top
STANDOFF111  STAND-OFF  [STAND-OFF]  56.13,113.54 0 top
STANDOFF112  STAND-OFF  [STAND-OFF]  73.91,103.38 0 top
STANDOFF113  STAND-OFF  [STAND-OFF]  97.28,113.54 0 top
STANDOFF114  STAND-OFF  [STAND-OFF]  79.5,103.38 0 top
STANDOFF115  STAND-OFF  [STAND-OFF]  79.5,113.54 0 top
STANDOFF116  STAND-OFF  [STAND-OFF]  97.28,103.38 0 top
STANDOFF117  STAND-OFF  [STAND-OFF]  120.65,113.54 0 top
STANDOFF118  STAND-OFF  [STAND-OFF]  102.87,103.38 0 top
STANDOFF119  STAND-OFF  [STAND-OFF]  102.87,113.54 0 top
STANDOFF120  STAND-OFF  [STAND-OFF]  120.65,103.38 0 top
U1  ADXL377  [LFCSP_LQ-16]  18.29,17.02 0 top
U2  ADXL377  [LFCSP_LQ-16]  41.66,17.02 0 top
U3  ADXL377  [LFCSP_LQ-16]  65.02,17.02 0 top
U4  ADXL377  [LFCSP_LQ-16]  88.39,17.02 0 top
U5  ADXL377  [LFCSP_LQ-16]  111.76,17.02 0 top
U6  ADXL377  [LFCSP_LQ-16]  18.29,35.31 0 top
U7  ADXL377  [LFCSP_LQ-16]  41.66,35.31 0 top
U8  ADXL377  [LFCSP_LQ-16]  65.02,35.31 0 top
U9  ADXL377  [LFCSP_LQ-16]  88.39,35.31 0 top
U10  ADXL377  [LFCSP_LQ-16]  111.76,35.31 0 top
U11  ADXL377  [LFCSP_LQ-16]  18.29,53.59 0 top
U12  ADXL377  [LFCSP_LQ-16]  41.66,53.59 0 top
U13  ADXL377  [LFCSP_LQ-16]  65.02,53.59 0 top
U14  ADXL377  [LFCSP_LQ-16]  88.39,53.59 0 top
U15  ADXL377  [LFCSP_LQ-16]  111.76,53.59 0 top
U16  ADXL377  [LFCSP_LQ-16]  18.29,71.88 0 top
U17  ADXL377  [LFCSP_LQ-16]  41.66,71.88 0 top
U18  ADXL377  [LFCSP_LQ-16]  65.02,71.88 0 top
U19  ADXL377  [LFCSP_LQ-16]  88.39,71.88 0 top
U20  ADXL377  [LFCSP_LQ-16]  111.76,71.88 0 top
U21  ADXL377  [LFCSP_LQ-16]  18.29,90.17 0 top
U22  ADXL377  [LFCSP_LQ-16]  41.66,90.17 0 top
U23  ADXL377  [LFCSP_LQ-16]  65.02,90.17 0 top
U24  ADXL377  [LFCSP_LQ-16]  88.39,90.17 0 top
U25  ADXL377  [LFCSP_LQ-16]  111.76,90.17 0 top
U26  ADXL377  [LFCSP_LQ-16]  18.29,108.46 0 top
U27  ADXL377  [LFCSP_LQ-16]  41.66,108.46 0 top
U28  ADXL377  [LFCSP_LQ-16]  65.02,108.46 0 top
U29  ADXL377  [LFCSP_LQ-16]  88.39,108.46 0 top
U30  ADXL377  [LFCSP_LQ-16]  111.76,108.46 0 top

## Library data of the parts
C1-C3 C5-C7 C9-C11 C13-C15 C17-C19 C21-C23 C25-C27 C29-C31 C33-C35 C37-C39 C41-C43 C45-C47 C49-C51 C53-C55 C57-C59 C61-C63 C65-C67 C69-C71 C73-C75 C77-C79 C81-C83 C85-C87 C89-C91 C93-C95 C97-C99 C101-C103 C105-C107 C109-C111 C113-C115 C117-C119 = SparkFun-Capacitors; PROD_ID: CAP-00867
C4 C8 C12 C16 C20 C24 C28 C32 C36 C40 C44 C48 C52 C56 C60 C64 C68 C72 C76 C80 C84 C88 C92 C96 C100 C104 C108 C112 C116 C120 = SparkFun-Capacitors; PROD_ID: CAP-00810
E$1 = SparkFun-Retired
E$4 E$6 FID1-FID60 LOGO1-LOGO90 = SparkFun-Aesthetics
JP1-JP30 = SparkFun-Connectors
STANDOFF1-STANDOFF120 = SparkFun-Electromechanical
U1-U30 = SparkFun-Sensors

## Nets
3.3V: C4.1 JP1.2 U1.14 U1.15
3.3V1: C8.1 JP2.2 U2.14 U2.15
3.3V2: C12.1 JP3.2 U3.14 U3.15
3.3V3: C16.1 JP4.2 U4.14 U4.15
3.3V4: C20.1 JP5.2 U5.14 U5.15
3.3V5: C24.1 JP6.2 U6.14 U6.15
3.3V6: C28.1 JP7.2 U7.14 U7.15
3.3V7: C32.1 JP8.2 U8.14 U8.15
3.3V8: C36.1 JP9.2 U9.14 U9.15
3.3V9: C40.1 JP10.2 U10.14 U10.15
3.3V10: C44.1 JP11.2 U11.14 U11.15
3.3V11: C48.1 JP12.2 U12.14 U12.15
3.3V12: C52.1 JP13.2 U13.14 U13.15
3.3V13: C56.1 JP14.2 U14.14 U14.15
3.3V14: C60.1 JP15.2 U15.14 U15.15
3.3V15: C64.1 JP16.2 U16.14 U16.15
3.3V16: C68.1 JP17.2 U17.14 U17.15
3.3V17: C72.1 JP18.2 U18.14 U18.15
3.3V18: C76.1 JP19.2 U19.14 U19.15
3.3V19: C80.1 JP20.2 U20.14 U20.15
3.3V20: C84.1 JP21.2 U21.14 U21.15
3.3V21: C88.1 JP22.2 U22.14 U22.15
3.3V22: C92.1 JP23.2 U23.14 U23.15
3.3V23: C96.1 JP24.2 U24.14 U24.15
3.3V24: C100.1 JP25.2 U25.14 U25.15
3.3V25: C104.1 JP26.2 U26.14 U26.15
3.3V26: C108.1 JP27.2 U27.14 U27.15
3.3V27: C112.1 JP28.2 U28.14 U28.15
3.3V28: C116.1 JP29.2 U29.14 U29.15
3.3V29: C120.1 JP30.2 U30.14 U30.15
GND: C1.2 C2.2 C3.2 C4.2 JP1.1 U1.6 U1.7
GND1: C5.2 C6.2 C7.2 C8.2 JP2.1 U2.6 U2.7
GND2: C9.2 C10.2 C11.2 C12.2 JP3.1 U3.6 U3.7
GND3: C13.2 C14.2 C15.2 C16.2 JP4.1 U4.6 U4.7
GND4: C17.2 C18.2 C19.2 C20.2 JP5.1 U5.6 U5.7
GND5: C21.2 C22.2 C23.2 C24.2 JP6.1 U6.6 U6.7
GND6: C25.2 C26.2 C27.2 C28.2 JP7.1 U7.6 U7.7
GND7: C29.2 C30.2 C31.2 C32.2 JP8.1 U8.6 U8.7
GND8: C33.2 C34.2 C35.2 C36.2 JP9.1 U9.6 U9.7
GND9: C37.2 C38.2 C39.2 C40.2 JP10.1 U10.6 U10.7
GND10: C41.2 C42.2 C43.2 C44.2 JP11.1 U11.6 U11.7
GND11: C45.2 C46.2 C47.2 C48.2 JP12.1 U12.6 U12.7
GND12: C49.2 C50.2 C51.2 C52.2 JP13.1 U13.6 U13.7
GND13: C53.2 C54.2 C55.2 C56.2 JP14.1 U14.6 U14.7
GND14: C57.2 C58.2 C59.2 C60.2 JP15.1 U15.6 U15.7
GND15: C61.2 C62.2 C63.2 C64.2 JP16.1 U16.6 U16.7
GND16: C65.2 C66.2 C67.2 C68.2 JP17.1 U17.6 U17.7
GND17: C69.2 C70.2 C71.2 C72.2 JP18.1 U18.6 U18.7
GND18: C73.2 C74.2 C75.2 C76.2 JP19.1 U19.6 U19.7
GND19: C77.2 C78.2 C79.2 C80.2 JP20.1 U20.6 U20.7
GND20: C81.2 C82.2 C83.2 C84.2 JP21.1 U21.6 U21.7
GND21: C85.2 C86.2 C87.2 C88.2 JP22.1 U22.6 U22.7
GND22: C89.2 C90.2 C91.2 C92.2 JP23.1 U23.6 U23.7
GND23: C93.2 C94.2 C95.2 C96.2 JP24.1 U24.6 U24.7
GND24: C97.2 C98.2 C99.2 C100.2 JP25.1 U25.6 U25.7
GND25: C101.2 C102.2 C103.2 C104.2 JP26.1 U26.6 U26.7
GND26: C105.2 C106.2 C107.2 C108.2 JP27.1 U27.6 U27.7
GND27: C109.2 C110.2 C111.2 C112.2 JP28.1 U28.6 U28.7
GND28: C113.2 C114.2 C115.2 C116.2 JP29.1 U29.6 U29.7
GND29: C117.2 C118.2 C119.2 C120.2 JP30.1 U30.6 U30.7
ST: JP1.6 U1.2
ST1: JP2.6 U2.2
ST2: JP3.6 U3.2
ST3: JP4.6 U4.2
ST4: JP5.6 U5.2
ST5: JP6.6 U6.2
ST6: JP7.6 U7.2
ST7: JP8.6 U8.2
ST8: JP9.6 U9.2
ST9: JP10.6 U10.2
ST10: JP11.6 U11.2
ST11: JP12.6 U12.2
ST12: JP13.6 U13.2
ST13: JP14.6 U14.2
ST14: JP15.6 U15.2
ST15: JP16.6 U16.2
ST16: JP17.6 U17.2
ST17: JP18.6 U18.2
ST18: JP19.6 U19.2
ST19: JP20.6 U20.2
ST20: JP21.6 U21.2
ST21: JP22.6 U22.2
ST22: JP23.6 U23.2
ST23: JP24.6 U24.2
ST24: JP25.6 U25.2
ST25: JP26.6 U26.2
ST26: JP27.6 U27.2
ST27: JP28.6 U28.2
ST28: JP29.6 U29.2
ST29: JP30.6 U30.2
X: C1.1 JP1.3 U1.5
X1: C5.1 JP2.3 U2.5
X2: C9.1 JP3.3 U3.5
X3: C13.1 JP4.3 U4.5
X4: C17.1 JP5.3 U5.5
X5: C21.1 JP6.3 U6.5
X6: C25.1 JP7.3 U7.5
X7: C29.1 JP8.3 U8.5
X8: C33.1 JP9.3 U9.5
X9: C37.1 JP10.3 U10.5
X10: C41.1 JP11.3 U11.5
X11: C45.1 JP12.3 U12.5
X12: C49.1 JP13.3 U13.5
X13: C53.1 JP14.3 U14.5
X14: C57.1 JP15.3 U15.5
X15: C61.1 JP16.3 U16.5
X16: C65.1 JP17.3 U17.5
X17: C69.1 JP18.3 U18.5
X18: C73.1 JP19.3 U19.5
X19: C77.1 JP20.3 U20.5
X20: C81.1 JP21.3 U21.5
X21: C85.1 JP22.3 U22.5
X22: C89.1 JP23.3 U23.5
X23: C93.1 JP24.3 U24.5
X24: C97.1 JP25.3 U25.5
X25: C101.1 JP26.3 U26.5
X26: C105.1 JP27.3 U27.5
X27: C109.1 JP28.3 U28.5
X28: C113.1 JP29.3 U29.5
X29: C117.1 JP30.3 U30.5
Y: C2.1 JP1.4 U1.4
Y1: C6.1 JP2.4 U2.4
Y2: C10.1 JP3.4 U3.4
Y3: C14.1 JP4.4 U4.4
Y4: C18.1 JP5.4 U5.4
Y5: C22.1 JP6.4 U6.4
Y6: C26.1 JP7.4 U7.4
Y7: C30.1 JP8.4 U8.4
Y8: C34.1 JP9.4 U9.4
Y9: C38.1 JP10.4 U10.4
Y10: C42.1 JP11.4 U11.4
Y11: C46.1 JP12.4 U12.4
Y12: C50.1 JP13.4 U13.4
Y13: C54.1 JP14.4 U14.4
Y14: C58.1 JP15.4 U15.4
Y15: C62.1 JP16.4 U16.4
Y16: C66.1 JP17.4 U17.4
Y17: C70.1 JP18.4 U18.4
Y18: C74.1 JP19.4 U19.4
Y19: C78.1 JP20.4 U20.4
Y20: C82.1 JP21.4 U21.4
Y21: C86.1 JP22.4 U22.4
Y22: C90.1 JP23.4 U23.4
Y23: C94.1 JP24.4 U24.4
Y24: C98.1 JP25.4 U25.4
Y25: C102.1 JP26.4 U26.4
Y26: C106.1 JP27.4 U27.4
Y27: C110.1 JP28.4 U28.4
Y28: C114.1 JP29.4 U29.4
Y29: C118.1 JP30.4 U30.4
Z: C3.1 JP1.5 U1.16
Z1: C7.1 JP2.5 U2.16
Z2: C11.1 JP3.5 U3.16
Z3: C15.1 JP4.5 U4.16
Z4: C19.1 JP5.5 U5.16
Z5: C23.1 JP6.5 U6.16
Z6: C27.1 JP7.5 U7.16
Z7: C31.1 JP8.5 U8.16
Z8: C35.1 JP9.5 U9.16
Z9: C39.1 JP10.5 U10.16
Z10: C43.1 JP11.5 U11.16
Z11: C47.1 JP12.5 U12.16
Z12: C51.1 JP13.5 U13.16
Z13: C55.1 JP14.5 U14.16
Z14: C59.1 JP15.5 U15.16
Z15: C63.1 JP16.5 U16.16
Z16: C67.1 JP17.5 U17.16
Z17: C71.1 JP18.5 U18.16
Z18: C75.1 JP19.5 U19.16
Z19: C79.1 JP20.5 U20.16
Z20: C83.1 JP21.5 U21.16
Z21: C87.1 JP22.5 U22.16
Z22: C91.1 JP23.5 U23.16
Z23: C95.1 JP24.5 U24.16
Z24: C99.1 JP25.5 U25.16
Z25: C103.1 JP26.5 U26.16
Z26: C107.1 JP27.5 U27.16
Z27: C111.1 JP28.5 U28.16
Z28: C115.1 JP29.5 U29.16
Z29: C119.1 JP30.5 U30.16